# Altium PCB AD9833_DDS.PcbDoc
Units mm, origin at the board's own origin, x right, y up, seen from the top; angles counter-clockwise.
Board outline 50 x 25 mm, 2 copper layers (Top Layer, Bottom Layer); 29 components, 17 nets, 72 pads, 3 vias.
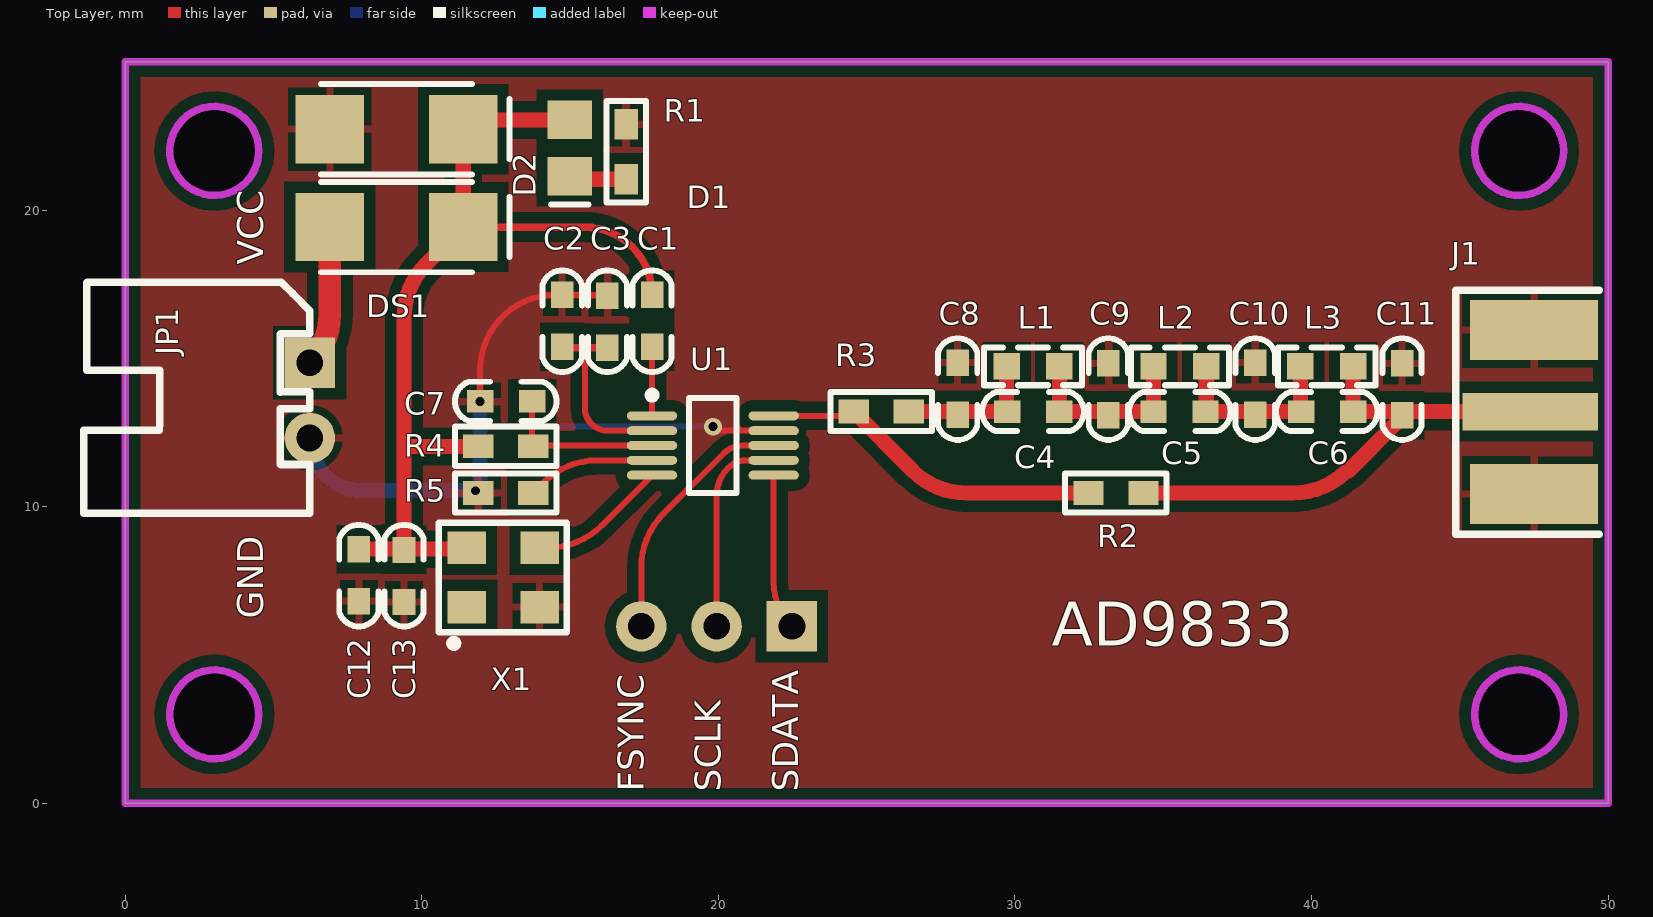
[diagram p0: Top Layer view]
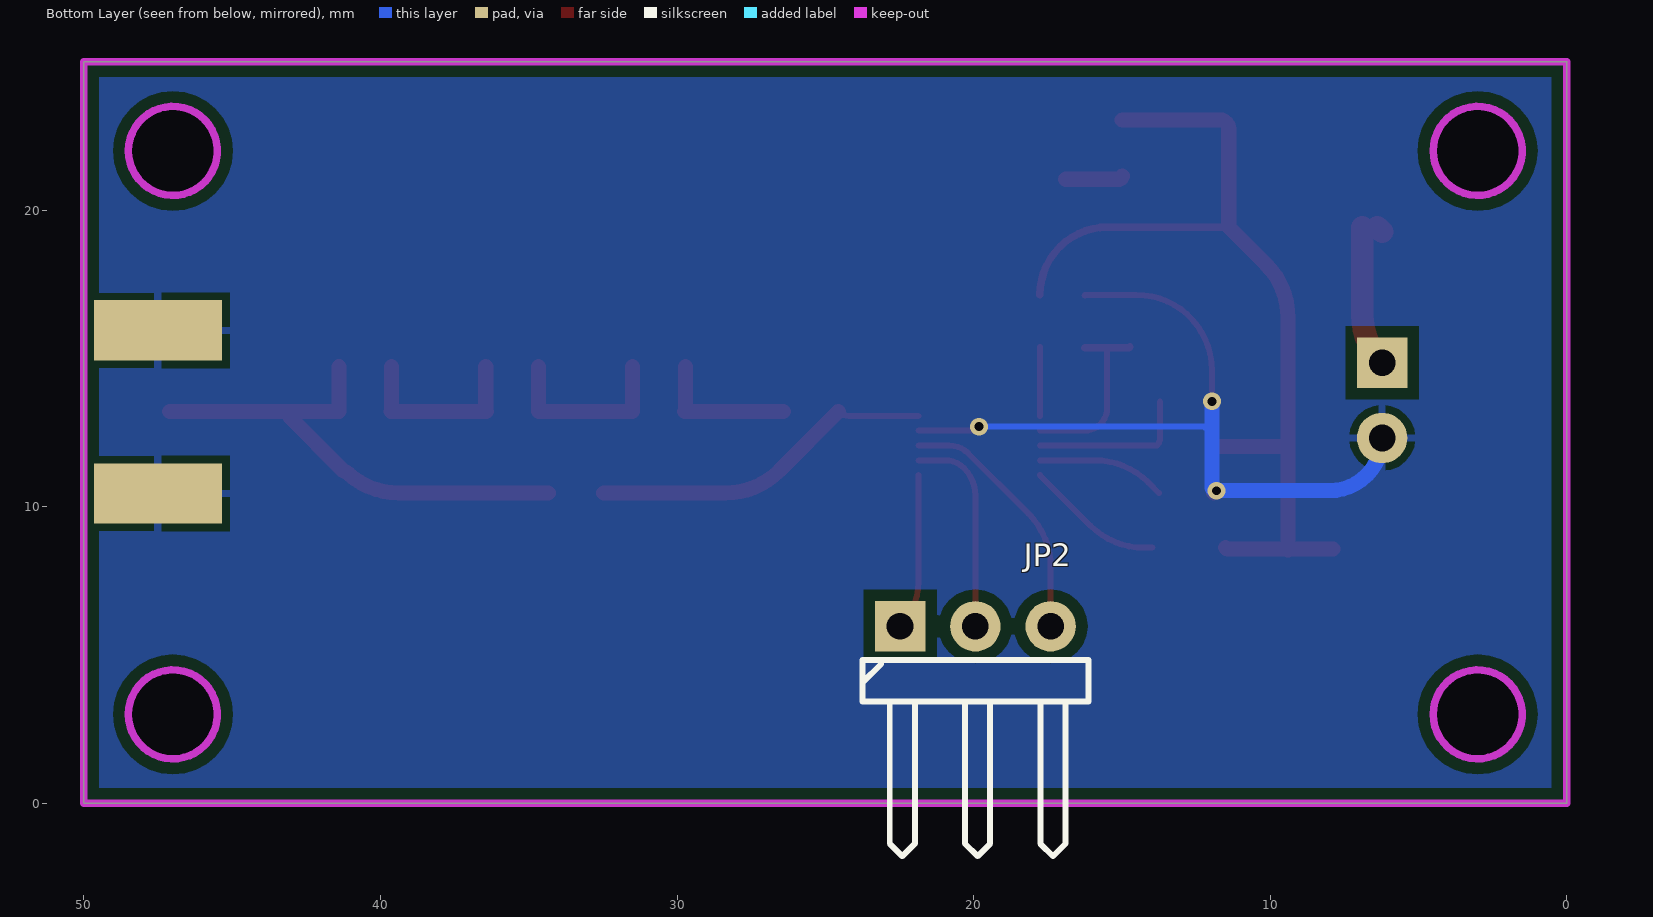
[diagram p1: Bottom Layer view, seen from below]

## Layer stack, top to bottom
Top Solder: solder mask 0.0102, Solder Resist, Dk 3.5
Top Layer: signal copper 0.0356
Dielectric 1: dielectric 0.32, FR-4, Dk 4.8
Bottom Layer: signal copper 0.0356
Bottom Solder: solder mask 0.0102, Solder Resist, Dk 3.5

## Board outline
0,0 0,25 50,25 50,0
cut-out: 3,1.5 cw(c3,3) 1.5,3 cw(c3,3) 3,4.5 cw(c3,3) 4.5,3 cw(c3,3)
cut-out: 45.5,3 ccw(c47,3) 47,1.5 ccw(c47,3) 48.5,3 ccw(c47,3) 47,4.5 ccw(c47,3)
cut-out: 45.5,22 ccw(c47,22) 47,20.5 ccw(c47,22) 48.5,22 ccw(c47,22) 47,23.5 ccw(c47,22)
cut-out: 3,20.5 cw(c3,22) 1.5,22 cw(c3,22) 3,23.5 cw(c3,22) 4.5,22 cw(c3,22)

## Design rules (kind name [scope] priority, off if disabled: settings)
Clearance [All] p1: gap=0.254 ignorepadtopadclearanceinfootprint=FALSE except(0: Arc-Hole Track-Hole SMDPad-Hole THPad-Hole Via-Hole Fill-Hole Poly-Hole Region-Hole Text-Hole; 0.152: Arc-SMDPad Track-SMDPad SMDPad-SMDPad; 0.203: Arc-Arc Arc-Track Track-Track; 0.381: Arc-Poly Track-Poly SMDPad-Poly THPad-Poly Via-Poly Fill-Poly Poly-Poly)
HoleToHoleClearance [All] p1: gap=0 allowstackedmicrovias=TRUE
MinimumSolderMaskSliver [All] p1: minsoldermaskwidth=0
PolygonConnect [All] p1: thpad.connectstyle=Relief thpad.reliefconductorwidth=0.254 thpad.reliefentries=4 thpad.polygonreliefangle="90 Angle" thpad.airgapwidth=0.254 smdpad.connectstyle=Relief smdpad.reliefconductorwidth=0.254 smdpad.reliefentries=4 smdpad.polygonreliefangle="90 Angle" smdpad.airgapwidth=0.254 via.connectstyle=Direct via.reliefconductorwidth=0.254 via.reliefentries=4 via.polygonreliefangle="90 Angle" via.airgapwidth=0.254
RoutingVias [All] p1: holewidth=0.3 width=0.6 viastyle="Through Hole" minholewidth=0.3 minwidth=0.6 maxholewidth=0.711 maxwidth=1.27
SilkToSilkClearance [All] p1: silktosilkclearance=0
SilkToSolderMaskClearance [IsPad] p1: minsilkscreentomaskgap=0 clearancetoexposedcopper=TRUE
SolderMaskExpansion [All] p1: expansion=0.102
Width [All] p1: maxlimit=2.54 minlimit=0.025 preferedwidth=0.254
26 further rules are at their usual default settings.

## Components (designator, comment, footprint, x,y, rotation, side; value= is the part's Value field where it differs from the comment)
C1 "103" "C 0603" 17.762,16.256 r270 top
C2 "104" "C 0603" 14.732,16.256 r270 top
C3 "10uF" "C 0603" 16.256,16.256 r90 top
C4 "120pF" "C 0603" 30.607,13.208 r180 top
C5 "180pF" "C 0603" 35.56,13.208 r0 top
C6 "47pF" "C 0603" 40.513,13.208 r180 top
C7 "104" "C 0603" 12.827,13.554 r180 top
C8 "820pF" "C 0603" 28.067,13.97 r270 top
C9 "1nF" "C 0603" 33.147,13.97 r90 top
C10 "820pF" "C 0603" 38.1,13.97 r270 top
C11 "330pF" "C 0603" 43.053,13.97 r90 top
C12 "104" "C 0603" 7.874,7.679 r270 top
C13 "10uF" "C 0603" 9.398,7.679 r90 top
D1 "LED" LED_0805 14.986,22.098 r270 top
D2 "TVS" DIODE-SMA 9.144,22.733 r0 top
DS1 "D Schottky" DIODE-SMA 9.144,19.431 r0 top
J1 "COAX" MCX5.08-5-H 47.371,13.208 r180 top
JP1 "HDR-1X2" XH2.54-2P_H 6.223,14.859 r270 top
JP2 "HDR-1X3" HDR-1X3_H 22.479,5.969 r180 bottom
L1 "2.2uH" "L 0603" 30.607,14.732 r0 top
L2 "2.2uH" "L 0603" 35.56,14.732 r0 top
L3 "1.8uH" "L 0603" 40.513,14.732 r0 top
R1 "1K" "R 0603" 16.891,21.971 r90 top
R2 "0" "R 0603" 33.401,10.463 r0 top
R3 "0" "R 0603" 25.489,13.208 r0 top
R4 "0" "R 0603" 12.827,12.038 r0 top
R5 "0" "R 0603" 12.827,10.463 r0 top
U1 "AD9833" MSOP-UN10_N 19.812,12.065 r0 top
X1 "XTAL" XTAL-3225 11.506,6.612 r90 top

## Footprints (in the part's own frame and the unit in brackets; to place one, negate y for a bottom-side part, rotate by r counter-clockwise, add the part's x,y. Pads: shape width x height; smd on the part's side, far side on the other; paste and mask are expansions set on the pad)
"C 0603" [mil] "无极性贴片电容"
  rect 35x30 smd: 1(-35,0) 2(34,0)
  silkscreen extent -67,-26 67,26, body extent -31,-16 31,16, height 32
DIODE-SMA [mm] "贴片二极管"
  rect 2.3x2.3 smd: 1(-2.25,0) 2(2.25,0)
  silkscreen extent -2.54,-1.52 3.81,1.52, body extent -2.92,-1.4 2.92,1.4, height 3
HDR-1X3_H [mm] "弯脚排针，3脚"
  rect 1.7x1.7 hole 0.9: 1(0,0)
  round 1.7 hole 0.9: 2(2.54,0) 3(5.08,0)
  silkscreen extent -1.27,-7.76 6.35,-1.14, body extent -1.27,-7.77 6.35,1.27, height 4.85
"L 0603" [mil] "小功率贴片电感"
  rect 35x35 smd: 1(-35,0) 2(35,0)
  silkscreen extent -65,-25 65,25, body extent -31,-16 31,16, height 31
LED_0805 [mm] "贴片二极管"
  rect 1.3x1.5 smd: 1(-0.95,0) 2(0.95,0)
  silkscreen extent 1.91,-0.63 1.91,0.64
MCX5.08-5-H [mil]
  rect 180x50 smd: 1(0,0)
  rect 170x80 smd: 2(-5,109.25) 5(-5,-108.27)
  rect 170x80 smd far side: 3(-5,108.66) 4(-5,-107.87)
  silkscreen extent -92,-161 99,163, body extent -93,-132 80,134, height 39
MSOP-UN10_N [mm] "TSSOP"
  oval 1.7x0.3 smd: 1(-2.05,1) 2(-2.05,0.5) 3(-2.05,0) 4(-2.05,-0.5) 5(-2.05,-1) 6(2.05,-1) 7(2.05,-0.5) 8(2.05,0) 9(2.05,0.5) 10(2.05,1)
  silkscreen extent -2.17,-1.6 0.8,1.82, body extent -1.6,-1.6 1.6,1.6, height 1.1
"R 0603" [mil] "1/10W贴片电阻"
  rect 40x31.5 smd: 1(-36.5,0) 2(36.5,0)
  silkscreen extent -68,-26 68,26, body extent -31,-16 32,16, height 16
XH2.54-2P_H [mm] "接插件，2P"
  rect 1.7x1.7 hole 0.9: 1(0,0)
  round 1.7 hole 0.9: 2(2.54,0)
  silkscreen extent -2.72,-7.62 5.08,0, body extent -2.5,-7.35 5.04,0.35, height 5.73
XTAL-3225 [mm] "有源晶振"
  rect 1.1x1.3 smd: 1(0,0) 2(0,-2.464) 3(2.007,-2.464) 4(2.007,0)
  silkscreen extent -1.35,-3.38 2.84,0.94, body extent -0.28,-2.82 2.22,0.38, height 0.8

## Part data
C1 C2 C3 C4 C5 C6 C7 C8 C9 C10 C11 C12 C13: library part C, "无极性贴片电容"
D1: "发光二极管", LatestRevisionDate=08-Jul-2005, LatestRevisionNote="Mech Layer 1 removed.", PackageReference=LED, Published=8-Jun-2000, Publisher="Altium Limited"
D2: "TVS保护", PackageDocument=Sep-1996, Code_JEDEC=DO-214-AB, LatestRevisionDate=17-Jul-2002, LatestRevisionNote="Re-released for DXP Platform.", PackageReference=SMC, Published=8-Jun-2000, Publisher="Altium Limited", Type=SMJB5.0A
DS1: "Schottky Diode", Code_JEDEC=DO-214-AA, LatestRevisionDate=17-Jul-2002, LatestRevisionNote="Re-released for DXP Platform.", PackageDescription="DO-214-AA/SMB; 2 C-Bend Leads; Body 5.3 x 3.6 mm, inc. leads (LxW)", PackageReference=SMB, Published=8-Jun-2000, Publisher="Altium Limited"
JP1: library part "Header 2", "2P接插件", BOM名称=2P接插件, 学习资源=www.ooocke.com, 版权归属=源创客
JP2: library part "Header 3", "3P接插件", BOM名称=3P接插件, 学习资源=www.ooocke.com, 版权归属=源创客
L1 L2 L3: library part L, "小功率贴片电感"
R1 R2 R3 R4 R5: library part R, "贴片电阻"
U1: "低功耗、12.75mW、2.3V至5.5V可编程波形发生器"
X1: library part XTAL_Oscillator, "有源晶振", Frequency=25MHz

## Via types
v1: diameter 0.6, hole 0.3, Top Layer to Bottom Layer, tented both sides, 3 vias

## Nets (pads, with @x,y where several pads share a name; then routed paths per layer and width w, separated by ;. In a path a pad name is that pad's centre, name@x,y a point inside that pad or via, vN(x,y) a via of type N, cw(c..) or ccw(c..) an arc to the next point about the centre after c; other vN are vias at no path point)
FSYNC: JP2.3 U1.8 | length 8.6
  Top Layer w0.203: JP2.3 17.399,7.965 cw(c19.939,7.965) 18.143,9.761 20.193,11.811 cw(c20.806,11.198) 20.806,12.065 U1.8
GND: C2.1 C3.2 C7.2 C8.1 C9.2 C10.1 C11.2 C12.2 C13.1 D2.1 J1.2 J1.3 J1.4 J1.5 JP1.2 R1.2 R5.1 U1.9 X1.2 | length 26.7
  Top Layer w0.203: v1(11.963,13.554) 11.963,14.605 cw(c14.503,14.605) 14.503,17.145 C2.1 16.195,17.145 cw(c16.195,17.058) C3.2 ; v1(19.812,12.7) 19.947,12.565 U1.9
  Top Layer w0.508: v1(11.811,10.541) 11.822,10.541 R5.1
  Bottom Layer w0.203: 11.963,12.446 cw(c12.09,12.446) 12.09,12.573 12.217,12.7 v1(19.812,12.7)
  Bottom Layer w0.508: JP1.2 ccw(c8.001,12.319) 8.001,10.541 v1(11.811,10.541) ccw(c11.811,10.693) 11.963,10.693 11.963,12.446 v1(11.963,13.554)
NetC1_2: C1.2 U1.1 | length 2.3
  Top Layer w0.203: U1.1 C1.2
NetC2_2: C2.2 C3.1 U1.2 | length 6.3
  Top Layer w0.203: 15.494,15.367 15.494,13.335 ccw(c16.264,13.335) 16.264,12.565 U1.2
  Top Layer w0.254: C2.2 ccw(c14.757,15.392) 14.757,15.367 15.494,15.367 C3.1
NetC4_1: C4.1 C5.1 C9.1 L1.2 L2.1 | length 6.2
  Top Layer w0.508: L1.2 C4.1 C5.1 L2.1
NetC4_2: C4.2 C8.2 L1.1 R3.2 | length 4.9
  Top Layer w0.508: R3.2 C4.2 cw(c29.805,13.269) 29.718,13.269 L1.1
NetC5_2: C5.2 C6.2 C10.2 L2.2 L3.1 | length 6.3
  Top Layer w0.508: L2.2 36.449,13.269 cw(c36.362,13.269) C5.2 C6.2 cw(c39.711,13.269) 39.624,13.269 L3.1
NetC6_1: C6.1 C11.1 J1.1 L3.2 R2.2 | length 17
  Top Layer w0.508: R2.2 39.383,10.463 ccw(c39.383,13.003) 41.072,11.106 ccw(c40.735,11.486) 41.074,11.108 ; 41.075,11.108 ccw(c40.739,11.49) 41.076,11.11 cw(c41.411,10.728) 41.243,11.207 43.053,13.018 C11.1 ; L3.2 C6.1 43.053,13.208 J1.1@47.117,13.208
NetC7_1: C7.1 R4.2 U1.3 | length 5.5
  Top Layer w0.203: C7.1 13.716,12.313 ccw(c14.067,12.313) 13.819,12.065 U1.3
NetD1_2: D1.2 R1.1 | length 2
  Top Layer w0.508: D1.2 ccw(c15.09,21.148) 15.09,21.044 R1.1
NetDS1_1: DS1.1 JP1.1 | length 5
  Top Layer w0.762: JP1.1 ccw(c4.603,16.479) 6.894,16.479 DS1.1 ; DS1.1@6.223,19.268 DS1.1@6.386,19.431
NetR2_1: R2.1 R3.1 U1.10 | length 11.7
  Top Layer w0.203: U1.10 24.217,13.065 ccw(c24.217,13.553) R3.1
  Top Layer w0.508: R3.1 26.562,11.207 ccw(c28.359,13.003) 28.359,10.463 R2.1
NetR5_2: R5.2 U1.4 | length 4.4
  Top Layer w0.203: R5.2 14.112,10.821 cw(c15.908,9.025) 15.908,11.565 U1.4
NetU1_5: U1.5 X1.3 | length 4.7
  Top Layer w0.203: X1.3 14.263,8.619 ccw(c14.263,11.159) 16.06,9.363 U1.5
SCLK: JP2.2 U1.7 | length 7
  Top Layer w0.203: JP2.2 19.939,10.383 cw(c21.24,10.383) 20.32,11.303 cw(c20.953,10.67) 20.953,11.565 U1.7
SDATA: JP2.1 U1.6 | length 5.3
  Top Layer w0.203: U1.6 21.862,7.459 ccw(c23.969,7.459) JP2.1
VCC: C1.1 C12.1 C13.2 D1.1 D2.2 DS1.2 R4.1 X1.4 | length 32.5
  Top Layer w0.254: DS1.2 15.476,19.431 cw(c15.476,17.145) C1.1
  Top Layer w0.508: C12.1 C13.2@9.398,8.568 ; C13.2 C13.2@9.398,8.568 ; X1.4 cw(c11.384,8.741) 11.384,8.568 C13.2@9.398,8.568 ; R4.1 9.463,12.038 cw(c9.463,12.13) 9.398,12.065 ; D1.1 11.709,23.048 ccw(c11.709,22.733) D2.2 DS1.2 10.142,18.179 ccw(c11.938,16.383) 9.398,16.383 9.398,12.065 ; C13.2@9.398,8.568 9.398,12.065
pads on no net: X1.1

## Polygon pours and split planes (outlines as drawn)
GND on Bottom Layer "Top Layer-No Net1" (solid, remove dead copper, pour order 1): 0,0 0,25 50,25 50,0
GND on Top Layer "Top Layer-No Net" (solid, remove dead copper, pour order 0): 0,0 0,25 50,25 50,0

## Keep-outs
Keep-Out Layer:
  circle w0.254: c47,3 r1.5
  circle w0.254: c3,3 r1.5
  circle w0.254: c47,22 r1.5
  circle w0.254: c3,22 r1.5
  pour cut-out: 45.5,22 ccw(c47,22) 47,20.5 ccw(c47,22) 48.5,22 ccw(c47,22) 47,23.5 ccw(c47,22)
  lines w0.254: 0,0 0,25 50,25 50,0 0,0

## Silkscreen, mask and mechanical layers (free items; w line width, h text height)
Top Overlay:
  text "VCC" at 4.953,18.161 h1.52 r90
  text "GND" at 4.953,6.223 h1.52 r90
  text "AD9833" at 31.242,4.826 h2.54
  text "FSYNC" at 17.78,0.381 h1.52 r90
  text "SCLK" at 20.383,0.381 h1.52 r90
  text "SDATA" at 22.987,0.381 h1.52 r90